# Altium PCB PCB1.PcbDoc
Units mm, origin at the board's own origin, x right, y up, seen from the top; angles counter-clockwise.
Board outline 72 x 52 mm, 2 copper layers (Top Layer, Bottom Layer), stack 1.581 mm thick; 32 components, 23 nets, 92 pads, 4 vias.
Unrouted connection lines stored in the file: 63.
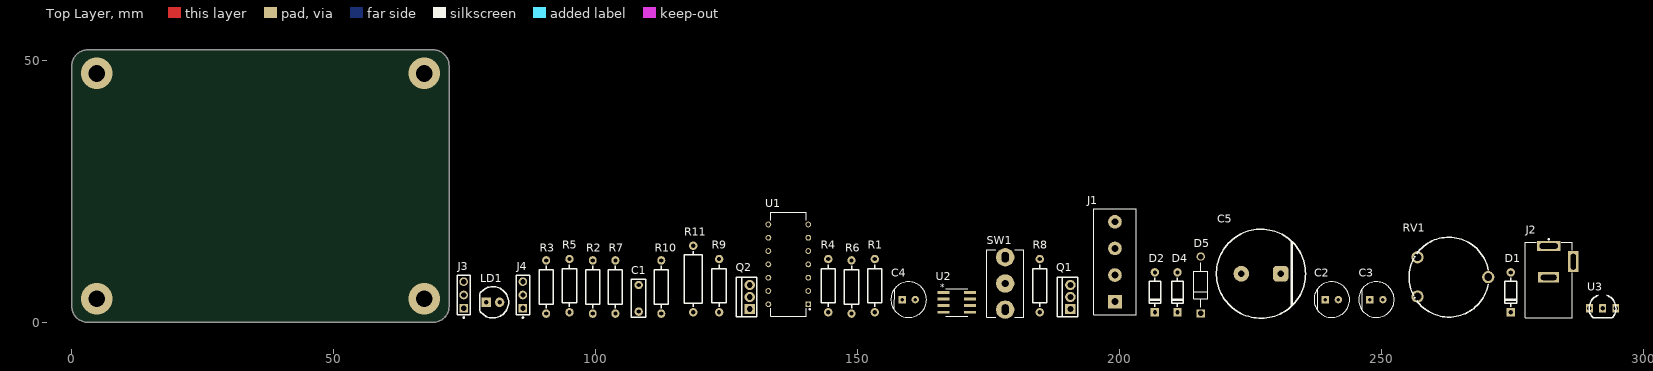
[diagram p0: Top Layer view]
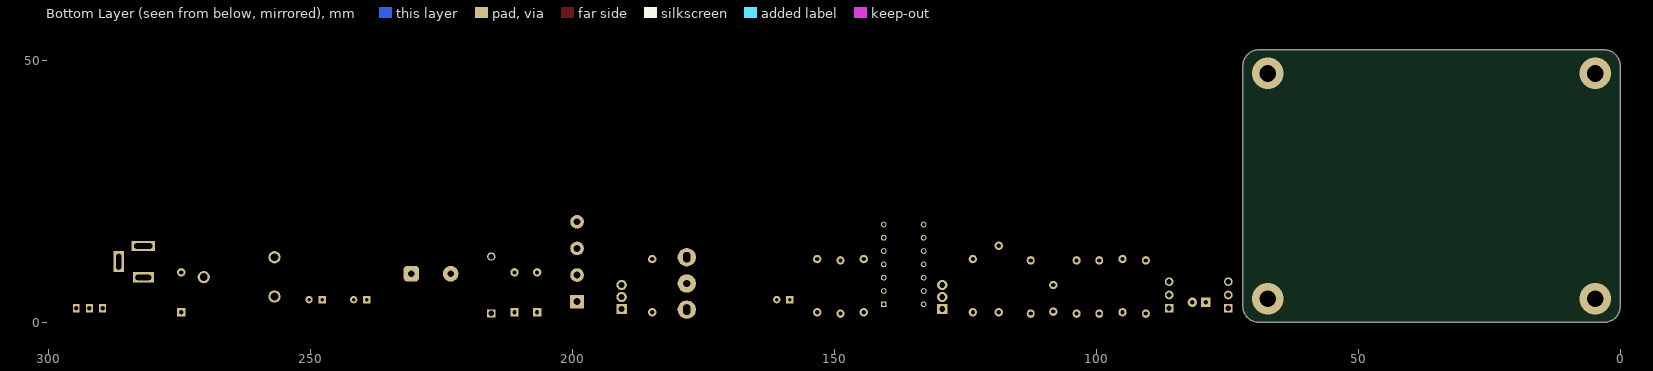
[diagram p1: Bottom Layer view, seen from below]

## Layer stack, top to bottom
Top Solder: solder mask 0.01, Solder Resist, Dk 3.5
Top Layer: signal copper 0.0356
Dielectric 1: dielectric 1.51, FR-4, Dk 4.8
Bottom Layer: signal copper 0.0356
Bottom Solder: solder mask 0.01, Solder Resist, Dk 3.5

## Board outline
0,3 0,49 cw(c3,49) 3,52 69,52 cw(c69,49) 72,49 72,3 cw(c69,3) 69,0 3,0 cw(c3,3)

## Design rules (kind name [scope] priority, off if disabled: settings)
Clearance [All] p1: gap=0.254 ignorepadtopadclearanceinfootprint=FALSE
PolygonConnect [All] p1: connectstyle=Relief reliefconductorwidth=0.254 reliefentries=4 polygonreliefangle="90 Angle" airgapwidth=0.254
RoutingVias [All] p1: holewidth=0.711 width=1.27 viastyle="Through Hole" minholewidth=0.711 minwidth=1.27 maxholewidth=0.711 maxwidth=1.27
SolderMaskExpansion [All] p1: expansion=0.102 istentingtop=FALSE
SupplyNets "Schematic Supply Nets_1" [InNet('GND')] p1: voltage=0.000
SupplyNets "Schematic Supply Nets" [InNet('+12')] p2: voltage=0.000
Width [All] p1: maxlimit=0.254 minlimit=0.254 preferedwidth=0.254
30 further rules are at their usual default settings.

## Components (designator, comment, footprint, x,y, rotation, side; value= is the part's Value field where it differs from the comment)
C1 "820pF" Cap_tht_5mm 108.204,2.032 r90 top
C2 "ECA1EM220I" Cap_radial_5mm 240.538,4.318 r0 top
C3 "ECA1EM220I" Cap_radial_5mm 249.047,4.318 r0 top
C4 "ECA1EM220I" Cap_radial_5mm 159.766,4.318 r0 top
C5 "B41896D5188M000" Cap_Radial_16mm 223.266,9.271 r0 top
D1 "BAT42" BAT42 274.701,1.905 r90 top
D2 "BAT42" BAT42 206.756,1.905 r90 top
D4 "BAT42" BAT42 211.074,1.905 r90 top
D5 "1N4749ATR" FP-017AH-MFG 215.519,7.112 r90 top
J1 "MC000036" MC000036 199.136,3.937 r90 top
J2 "PJ-002A" DC_jack 281.94,11.557 r90 top
J3 "5-146278-3" TE_5-146278-3 74.803,5.207 r90 top
J4 "5-146278-3" TE_5-146278-3 86.106,5.207 r90 top
LD1 "TLHR5200" LED_5.0mm 79.121,3.81 r0 top
Q1 "IRFU3910PBF" TO-251AA 190.627,2.286 r90 top
Q2 "IRFU3910PBF" TO-251AA 129.413,2.286 r90 top
R1 "2K7" Res_2k7_Axial_DIN0207 153.289,1.905 r90 top
R2 "1k" resistor_1k 99.441,1.651 r90 top
R3 "1k" resistor_1k 90.551,1.651 r90 top
R4 "10K" Res_10k_Axial_DIN0207 144.399,1.905 r90 top
R5 "10K" Res_10k_Axial_DIN0207 94.996,1.905 r90 top
R6 "1k" resistor_1k 148.844,1.651 r90 top
R7 "1k" resistor_1k 103.759,1.651 r90 top
R8 "22R" Res_22R_Axial_DIN0207 184.785,1.905 r90 top
R9 "22R" Res_22R_Axial_DIN0207 123.571,1.905 r90 top
R10 "1k" resistor_1k 112.522,1.651 r90 top
R11 "1R / 0.5W" Res_1R_Axial_DIN0309 118.618,1.905 r90 top value=1R
RV1 "14TR08SA104C" Potentiometer 255.905,3.81 r0 top value=100K
SW1 "A201SYCB04" A201SYCB04 178.181,2.413 r90 top
U1 "CD40106BE" DIP762W45P254L1969H508Q14 136.779,11.049 r90 top
U2 "IR2104SPBF" SOIC8_INF-M 168.91,3.81 r0 top
U3 "L78L10" TO-92 293.497,2.667 r0 top

## Footprints (in the part's own frame and the unit in brackets; to place one, negate y for a bottom-side part, rotate by r counter-clockwise, add the part's x,y. Pads: shape width x height; smd on the part's side, far side on the other; paste and mask are expansions set on the pad)
A201SYCB04 [mm]
  round 3.5 hole 1.4 slot 2 at 0 deg paste-2539.97 mask+0: 1(0,0) 3(10,0)
  round 3.5 hole 1.4 paste-2539.97 mask+0: 2(5,0)
  silkscreen extent -1.48,-3.56 11.48,3.56, body extent -1.4,-3.47 11.3,3.43, height 29.77
BAT42 [mm]
  rect 1.6x1.6 hole 0.8 paste-2539.97 mask+0: 1(0,0)
  rrect100% 1.6x1.6 hole 0.8 paste-2539.97 mask+0: 2(7.62,0)
  silkscreen extent 1.04,-1.12 6.58,1.12, body extent -0.28,-1 7.9,1, height 2.11
Cap_radial_5mm [mm]
  rect 1.4x1.4 hole 0.65 paste-2539.97 mask+0: 1(-1.25,0)
  round 1.4 hole 0.65 paste-2539.97 mask+0: 2(1.25,0)
  silkscreen extent -3.4,-3.4 3.4,3.4, body extent -3.5,-3.5 3.5,3.5, height 0.25
Cap_Radial_16mm [mm]
  rrect50% 3x3 hole 1.2 paste-2539.97 mask+0: 1(7.5,0)
  round 3 hole 1.2 paste-2539.97 mask+0: 2(0,0)
  silkscreen extent -4.75,-8.5 12.25,8.5, body extent -4.26,-8.09 11.94,8.09, height 35.86
Cap_tht_5mm [mm]
  round 1.6 hole 0.8 paste-2539.97 mask+0: 1(0,0) 2(5.08,0)
  silkscreen extent -1.08,-1.37 6.16,1.37, body extent -0.55,-1.32 5.63,1.31, height 7.5
DC_jack [mm]
  rect 2x4.5 hole 1 slot 3.5 at 90 deg: 1(3,0)
  rect 2x4 hole 1 slot 3 at 90 deg: 2(-3,0)
  rect 4x2 hole 1 slot 3 at 0 deg: 3(0,-4.7)
  silkscreen extent -10.7,-4.5 4.42,4.5, body extent -10.7,-4.9 3.7,4.5, height 11
DIP762W45P254L1969H508Q14 [mm] "DIP, 7.62 mm lead span, 2.54 mm pitch; 14 pin, 19.69 mm L X 6.60 mm W X 5.08 mm H body"
  rect 1.1x1.1 / inner round 1.1 / far side rect 1.1x1.1 hole 0.7 paste-2539.97: 1(-7.62,-3.81)
  round 1.1 hole 0.7 paste-2539.97: 2(-5.08,-3.81) 3(-2.54,-3.81) 4(0,-3.81) 5(2.54,-3.81) 6(5.08,-3.81) 7(7.62,-3.81) 8(7.62,3.81) 9(5.08,3.81) 10(2.54,3.81) 11(0,3.81) 12(-2.54,3.81) 13(-5.08,3.81) 14(-7.62,3.81)
  silkscreen extent -9.92,-4.24 9.92,3.37, body extent -9.84,-3.85 9.85,3.92, height 5.08
FP-017AH-MFG [mm]
  rect 1.6x1.6 hole 1.05 paste-2539.97 mask+0: 1(-5.438,0)
  round 1.6 hole 1.05 paste-2539.97 mask+0: 2(5.438,0)
  silkscreen extent -4.24,-1.36 4.24,1.36, body extent -6.34,-1.46 6.34,1.46, height 0.25
LED_5.0mm [mm]
  rect 1.8x1.8 hole 0.9 paste-2539.97 mask+0: 1(0,0)
  round 1.8 hole 0.9 paste-2539.97 mask+0: 2(2.54,0)
  silkscreen extent -1.29,-2.99 4.26,2.99, body extent -1.23,-2.95 4.21,2.95, height 1.8
MC000036 [mm]
  rect 2.6x2.6 hole 1.3 paste-2539.97 mask+0: 1(0,0)
  round 2.6 hole 1.3 paste-2539.97 mask+0: 2(5.08,0) 3(10.16,0) 4(15.24,0)
  silkscreen extent -2.54,-4.05 17.78,4.05, body extent -3.16,-4.92 17.76,5.58, height 19.51
Potentiometer [mm]
  round 2.34 hole 1.5 paste-2539.97 mask+0: 1(1,1.1) 2(14.49,4.8) 3(1,8.6)
  silkscreen extent -0.63,-2.82 14.5,12.42, body extent 0.54,-2.2 14.82,11.8, height 8.83
Res_1R_Axial_DIN0309 [mm]
  round 1.6 hole 0.8 paste-2539.97 mask+0: 1(0,0)
  rrect100% 1.6x1.6 hole 0.8 paste-2539.97 mask+0: 2(12.7,0)
  silkscreen extent 1.04,-1.72 11.66,1.72, body extent -0.2,-1.27 12.9,1.23, height 2.65
Res_2k7_Axial_DIN0207 [mm]
  round 1.6 hole 0.8 paste-2539.97 mask+0: 1(0,0)
  rrect100% 1.6x1.6 hole 0.8 paste-2539.97 mask+0: 2(10.16,0)
  silkscreen extent 1.04,-1.37 9.12,1.37, body extent -0.3,-1.16 10.46,1.16, height 2.93
Res_10k_Axial_DIN0207 [mm]
  round 1.6 hole 0.8 paste-2539.97 mask+0: 1(0,0)
  rrect100% 1.6x1.6 hole 0.8 paste-2539.97 mask+0: 2(10.16,0)
  silkscreen extent 1.04,-1.37 9.12,1.37, body extent -0.3,-1.16 10.46,1.16, height 2.93
Res_22R_Axial_DIN0207 [mm]
  round 1.6 hole 0.8 paste-2539.97 mask+0: 1(0,0)
  rrect100% 1.6x1.6 hole 0.8 paste-2539.97 mask+0: 2(10.16,0)
  silkscreen extent 1.04,-1.37 9.12,1.37, body extent -0.3,-1.16 10.46,1.16, height 2.93
resistor_1k [mm]
  oval 1.6x1.524 hole 0.8: 1(0,0) 2(10.16,0)
  silkscreen extent 1.03,-1.35 9.13,1.35, body extent -0.3,-1.16 10.46,1.16, height 3.73
SOIC8_INF-M [mil]
  rect 90x22 smd paste+0 mask+0: 1(-99,75) 2(-99,25) 3(-99,-25) 4(-99,-75) 5(99,-75) 6(99,-25) 7(99,25) 8(99,75)
  silkscreen extent -84,-104 84,104, body extent -122,-99 122,99, height 69
TE_5-146278-3 [mm] "TE CONNECTIVITY"
  rect 1.65x1.65 hole 1: 1(-2.54,0)
  round 1.65 hole 1: 2(0,0) 3(2.54,0)
  silkscreen extent -4.44,-1.27 3.81,1.27, body extent -3.81,-1.27 3.81,1.13, height 8.31
TO-92 [mm]
  rrect25% 1.3x1.7 hole 0.85 paste-2539.97 mask+0: 1(1.23,0) 2(-1.27,0)
  rect 1.3x1.7 hole 0.85 paste-2539.97 mask+0: 3(-3.77,0)
  silkscreen extent -3.85,-1.85 1.3,2.45, body extent -4.21,-0.98 1.64,2.45, height 7.95
TO-251AA [mm]
  rect 1.905x2 hole 1.1 paste-2539.97 mask+0: 1(0.26,0)
  rrect100% 1.905x2 hole 1.1 paste-2539.97 mask+0: 2(2.54,0) 3(4.82,0)
  silkscreen extent -1.27,-1.37 6.35,2.54, body extent -0.34,-0.98 5.42,1.4, height 9.33

## Part data
C1: library part "Capacitor 820pF", "Ceramic Disc Capacitor, 820 pF, 100 V, ± 10%, Y5P, 5 mm, Radial Leaded", Capacitance=820pF, Farnell=2924986
C2 C3 C4: library part "Capacitor Electrolytic 5mm", "Electrolytic Capacitor, 22 µF, 25 V, ± 20%, Radial Leaded, 2000 hours @ 85°C, Polar", Capacitance=22uF, Farnell=3888911
C5: library part "Capacitor Electrolytic 16mm", "Electrolytic Capacitor, 1800 µF, 25 V, ± 20%, Radial Leaded, 7000 hours @ 125°C, Polar", Capacitance=1800uF, Farnell=2750197
D1 D2 D4: library part "Schottky diode 30 V", "Small Signal Schottky Diode, Single, 30 V, 200 mA, 400 mV, 4 A, 125 °C", Supplier Part Number 1=625-BAT42, Farnell=9801430, Supplier 1=Mouser
D5: library part zener_diode24V, "1N4749ATR 1N4749 Series 24 V 1 W 5 uA Through Hole Zener Diode - DO-41", Manufacturer Lifecycle Status=ACTIVE, Max Junction Temperature (Tj)=200°C, Max Power Dissipation=1W, Max Reverse Leakage Current=5µA, Min Operating Temperature=-65°C, Output Current=2.4A, Reverse Voltage=18.2V, Test Current=10.5mA, Tolerance=5%, Voltage Rating (DC)=24V, Contact Plating=Tin, Diameter=2.72mm, Element Configuration=Single, ESD Protection=No, Height=2.72mm, Impedance=25Ω, Lead Free="Lead Free", Length=5.2mm, Lifecycle Status=Production, Material=Glass, Max Operating Temperature=200°C, Mount="Through Hole", NexarPartId=84408802, Number of Pins=2, Packaging="Cut Tape", Peak Reverse Current=5µA, Power Dissipation=1W, Power Rating=1W, Radiation Hardening=No, REACH SVHC="No SVHC", RoHS=Compliant, Schedule B="8541100050, 8541100050|8541100050, 8541100050|8541100050|8541100050, 8541100050|8541100050|8541100050|8541100050", Voltage Tolerance=5%, Weight=245mg, Working Voltage=24V, Zener Current=10.5mA, Zener Voltage=24V
J1: library part "Screw terminal", "MULTICOMP PRO MC000036Wire-To-Board Terminal Block, 5.08 mm, 4 Ways, 26 AWG, 12 AWG, 4 mm², Screw", Farnell=2008006
J2: library part "Power Jack", "Through Hole Right Angle DC Power Jack, 2.5 A, 2 mm Center Pin, 3 Position, -25 to 85 degC, RoHS, Bulk", Current Rating=2.5A, Flammability Rating=UL94V-0, Insulation Resistance=50MOhms, Manufacturer=CUIInc., Operating Temperature Range=-25Cto+85C, Package Description="3-Pin Through Hole Device, Body 14.4 x 9 mm, Height 11 mm", Voltage Rating=24V, Brand=CUI, Connector Type=DCPowerJack, Contact Gender=Male, Contact Material=Copper, Contact Plating=Nickel, Datasheet URL=http://www.cui.com/product/resource/pj-002a.pdf, Datasheet Version="Rev. 1.03, 04/2016", Factory Pack Quantity=500, Housing Material=PolybutyleneTerephthalate(PBT), Inside Contact Diameter=2mm, Manufacturer URL=http://www.cui.com/, Mounting Angle=Right, Mounting Style=ThroughHole, Mounting Technology=ThroughHole, Mouser=490-PJ-002A, Outside Contact Diameter=6.5mm, Package Reference=PJ-002A, Product=Jacks, Product Category=DCPowerConnectors, RoHS=True, Termination Style=ThroughHole
J3 J4: library part "Header 3x1M", "Pin Header, Board-to-Board, 2.54 mm, 1 Rows, 3 Contacts, Through Hole Straight, AMPMODU II Series", ComponentLink1Description="Datasheet URL", ComponentLink1URL=http://www.te.com/commerce/DocumentDelivery/DDEController?Action=srchrtrv&DocNm=146278&DocType=Customer+Drawing&DocLang=English, Farnell=3791596
LD1: library part "LED Red", "LED, Red, Through Hole, T-1 3/4 (5mm), 20 mA, 2 V, 635 nm", ComponentLink1Description="Datasheet link", ComponentLink1URL=https://www.farnell.com/datasheets/2049871.pdf, Farnell=1045479
Q1 Q2: library part "MOSFET N-channel 16A", "Power MOSFET, N Channel, 100 V, 16 A, 0.115 ohm, TO-251AA, Through Hole", Farnell=3155148
R1: library part Res_2k7
R2 R3 R6 R7 R10: library part R1k, 1k=1k
R4 R5: library part Res_10k
R8 R9: library part Res_22R
R11: library part Res_1R
RV1: library part Trimmer
SW1: library part "Toggle Switch", "Toggle Switch, On-On, DPDT, Non Illuminated, GEMINI, Panel Mount", Farnell=1197677
U1: library part "Schmitt trigger", "Logic IC, Inverter, Hex, 1 Inputs, 14 Pins, DIP, 40106", Supplier Part Number 1=595-CD40106BE, Farnell=3120105, Supplier 1=Mouser
U2: "No Description Available", Mfr_Name=Infineon, RefDes=RefDes, Type=Type
U3: library part "LDO 10V", "Linear Voltage Regulator, Fixed, 16V to 35V Input, 10V/100mA Out, TO-92"

## Via types
v1: diameter 6, hole 3.2, Top Layer to Bottom Layer, 4 vias

## Nets (pads, with @x,y where several pads share a name; then routed paths per layer and width w, separated by ;. In a path a pad name is that pad's centre, name@x,y a point inside that pad or via, vN(x,y) a via of type N, cw(c..) or ccw(c..) an arc to the next point about the centre after c; other vN are vias at no path point)
+12: C5.2 D5.1 J1.4 J2.1 Q1.2 U3.3
GND: C1.2 C2.1 C3.1 C5.1 D5.2 J1.3 J2.2 J2.3 J3.3 J4.3 LD1.1 Q2.3 R4.2 R5.2 R11.2 U1.5 U1.7 U1.9 U1.11 U1.13 U2.4 U3.2
NetC1_1: C1.1 R1.2 U1.1
NetC2_2: C2.2 C3.2 D4.2 SW1.2 U1.14 U2.1 U3.1
NetC4_1: C4.1 J1.1 Q1.3 Q2.2 R10.1 U2.6
NetC4_2: C4.2 D4.1 U2.8
NetD1_1: D1.1 D2.2 R1.1
NetD1_2: D1.2 RV1.1
NetD2_1: D2.1 RV1.3
NetJ1_2: J1.2 J4.2 R11.1
NetJ3_1: J3.1 R2.1
NetJ3_2: J3.2 R4.1 R6.1
NetJ4_1: J4.1 R10.2
NetLD1_2: LD1.2 R3.1
NetQ1_1: Q1.1 R8.2
NetQ2_1: Q2.1 R9.2
NetR2_2: R2.2 U1.4
NetR5_1: R5.1 R7.1 SW1.1
NetR6_2: R6.2 U2.2
NetR7_2: R7.2 U2.3
NetR8_1: R8.1 U2.7
NetR9_1: R9.1 U2.5
NetRV1_2: RV1.2 U1.2 U1.3
pads on no net: R3.2 SW1.3 U1.6 U1.8 U1.10 U1.12
copper on no net:
  other v1: 4.75,4.5 67.25,4.5 4.75,47.5 67.25,47.5

## Silkscreen, mask and mechanical layers (free items; w line width, h text height)
Board Shape:
  the board outline again, w0.254

## Text inside footprints (layer, text, board x,y; h text height)
U2: Top Overlay "*" at 165.824,6.147 h1.27; Top 3D Body "*" at 166.98,4.966 h1.27